# EAGLE board gemma (EAGLE 6.3)
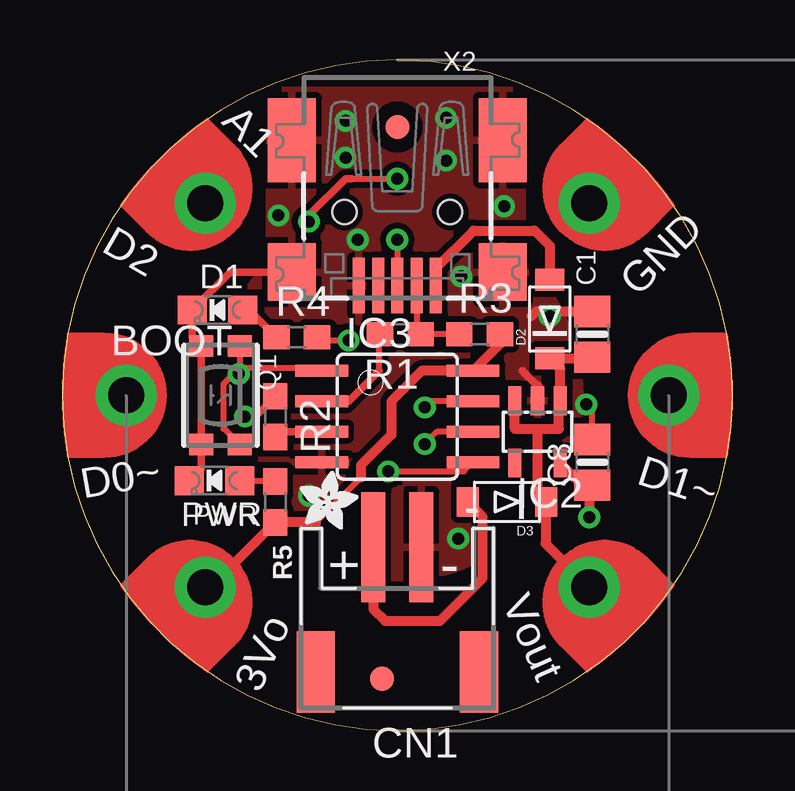
[diagram p0: board, top side]
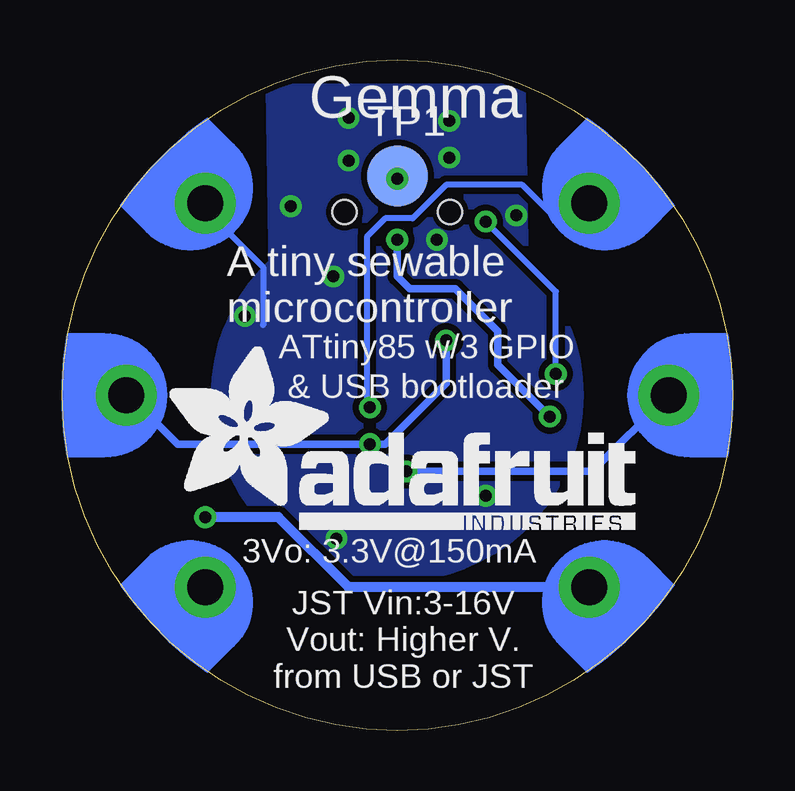
[diagram p1: board, bottom side, seen from below]

Size 27.94 x 27.94 mm. Coordinates in mm from the lower left corner, seen from the top.
Outline: 0,13.97 arc90 13.97,0 arc90 27.94,13.97 arc90 13.97,27.94 arc90 0,13.97
Copper layers (1*16): Top 0.035mm / dielectric 1.5mm / Bottom 0.035mm
Design rules "adafruit *": minimum track width 8mil, minimum drill 15.5mil, track to track 10mil, track to pad 10mil, pad to pad 12mil, via to via 10mil, smd to smd 8mil, copper to edge 10mil, drill to drill 8mil, minimum pad ring 10mil, minimum via ring 8mil, stop-mask expansion 4mil, vias tented up to drill 20mil, thermal gap 10mil

## Footprints (pad centres in the part's own frame; a part is rotated, then mirrored left to right if it is on the bottom)
SEWINGTAP_2.0 = drill 1.5 pad 2.54: P$1 0,0
CHIPLED_0805_NOOUTLINE = smd 1.2 x 1.2: A 0,-1.05; C 0,1.05
0805-NO = smd 1.3 x 1.5: 1 -0.95,0; 2 0.95,0
JST-PH-2-SMT-RA = smd 1 x 4.6: 1 1,-3.7; 2 -1,-3.7 | smd 1.6 x 3.4: NC1 -3.4,1.5; NC2 3.4,1.5
SOD-123FL = smd 0.91 x 1.22: A 1.637,0; C -1.637,0
SOT23-5L = smd 0.55 x 1.2: 1 -0.95,-1.3; 2 0,-1.3; 3 0.95,-1.3; 4 0.95,1.3; 5 -0.95,1.3
SOIC8 = smd 0.5 x 2.2: 1 -1.905,-3.154; 2 -0.645,-3.154; 3 0.625,-3.154; 4 1.895,-3.154; 5 1.905,3.154; 6 0.635,3.154; 7 -0.635,3.154; 8 -1.905,3.154
BTN_KMR2_4.6X2.8 = smd 0.9 x 1: A 2.05,0.8; A' -2.05,0.8; B 2.05,-0.8; B' -2.05,-0.8
0603-NO = smd 1.1 x 1: 1 -0.85,0; 2 0.85,0
B2,54 = smd 2.54 x 2.54: TP 0,0
FIDUCIAL_1MM = smd 1 x 1: 1 0,0
USB-MINI_MEDIUM = smd 0.5 x 2.308: D+ 0,4.064; D- -0.8,4.064; GND 1.6,4.064; ID 0.8,4.064; VBUS -1.6,4.064 | smd 2 x 3.5: GND1 -4.4,-2; GND4 4.4,-2 | smd 2 x 2.4: GND2 -4.4,3.5; GND3 4.4,3.5 | hole 1: -2.2,1; 2.2,1

## Placement (x,y rotation side)
3V3  SEWTAP-2.0IN  [SEWINGTAP_2.0]  5.97,5.97 135 top
B0  SEWTAP-2.0IN  [SEWINGTAP_2.0]  2.67,13.97 90 top
B1  SEWTAP-2.0IN  [SEWINGTAP_2.0]  25.27,13.97 270 top
B2  SEWTAP-2.0IN  [SEWINGTAP_2.0]  5.97,21.97 45 top
BOOT  red  [CHIPLED_0805_NOOUTLINE]  6.48,17.53 90 top
C1  10uF  [0805-NO]  22.1,16.51 90 top
C8  10uF  [0805-NO]  22.1,11.18 90 top
CN1  JST-PH  [JST-PH-2-SMT-RA]  13.97,3.94 180 top
D2  SCHOTTKY  [SOD-123FL]  20.32,17.14 90 top
D3  SCHOTTKY  [SOD-123FL]  18.54,9.53 180 top
GND  SEWTAP-2.0IN  [SEWINGTAP_2.0]  21.97,21.97 315 top
IC2  MIC5225-3.3v  [SOT23-5L]  19.81,12.45 180 top
IC3  ATTINY85  [SOIC8]  13.97,13.08 270 top
PWR  green  [CHIPLED_0805_NOOUTLINE]  6.35,10.41 90 top
Q1  reset  [BTN_KMR2_4.6X2.8]  6.6,13.97 270 top
R1  68 (0603)  [0603-NO]  14.1,16.51 180 top
R2  68 (0603)  [0603-NO]  8.89,13.08 270 top
R3  1.5K (0603)  [0603-NO]  17.4,16.51 0 top
R4  470 (0603)  [0603-NO]  9.78,16.38 0 top
R5  470 (0603)  [0603-NO]  8.89,9.53 270 top
TP1  TPB2,54  [B2,54]  13.97,23.11 0 bottom
U$1  FIDUCIAL  [FIDUCIAL_1MM]  13.97,25.15 0 top
U$2  [ADAFRUIT_2.5MM]  9.91,8.38 0 top
U$6  FIDUCIAL  [FIDUCIAL_1MM]  13.34,2.16 0 top
U$7  [ADAFRUIT_TEXT_20MM]  23.62,8.38 0 bottom
VBAT  SEWTAP-2.0IN  [SEWINGTAP_2.0]  21.97,5.97 225 top
X2  MiniB  [USB-MINI_MEDIUM]  13.97,22.61 180 top

## Library data of the parts
3V3 B0 B1 B2 CN1 D2 D3 GND IC2 U$1 U$6 VBAT = adafruit
BOOT C1 C8 PWR Q1 R1-R5 U$2 U$7 X2 = microbuilder
IC3 = avr
TP1 = testpad

## Nets
+3V3: 3V3.P$1 C8.1 IC2.5 IC3.8 R3.2 R5.2
B0: B0.P$1 IC3.5
B1: B1.P$1 IC3.6 R4.2
B2: B2.P$1 IC3.7
GND: BOOT.C C1.2 C8.2 CN1.2 GND.P$1 IC2.2 IC3.4 PWR.C Q1.B Q1.B' X2.GND X2.GND1 X2.GND2 X2.GND3 X2.GND4
N$1: IC3.1 Q1.A Q1.A' TP1.TP
N$2: R2.1 X2.D+
N$3: IC3.2 R1.2
N$4: IC3.3 R2.2
N$5: R1.1 R3.1 X2.D-
N$6: BOOT.A R4.1
N$7: C1.1 D2.C D3.C IC2.1 IC2.3 VBAT.P$1
N$8: PWR.A R5.1
VBAT: CN1.1 D3.A
VBUS: D2.A X2.VBUS

## Tracks (layer width: path | path; a pad name or v marks a point on that pad's centre or on a via)
+3V3  (via drill 0.5)
  Top 0.254: 3V3.P$1 6.18,5.97 | 12.45,10.54 10.58,8.68
  Top 0.406: IC2.5 21.68,10.23 C8.1 21.97,10.1 v21.97,8.89 | 17.51,14.99 IC3.8 | IC3.8 14.99,14.99 13.72,13.72 13.72,12.32 12.45,11.05 12.45,10.54 | 10.58,8.68 R5.2 6.18,5.97 | R3.2 18.25,16.11 IC3.8
  Bottom 0.406: 3V3.P$1 16,5.97 18.92,8.89 v21.97,8.89
B0  (via drill 0.5)
  Top 0.254: v13.59,10.8 16.74,10.8 IC3.5
  Bottom 0.305: B0.P$1 5.84,10.8 v13.59,10.8
B1  (via drill 0.5)
  Top 0.254: R4.2 10.76,16.26 v11.94,16.26 | IC3.6 15.62,12.45 v15.11,11.94
  Bottom 0.254: 25.27,13.59 B1.P$1
  Bottom 0.305: B1.P$1 25.15,13.97 23.11,11.94 v15.11,11.94 14.48,11.94 11.94,14.48 v11.94,16.26
B2  (via drill 0.5)
  Top 0.254: IC3.7 15.37,13.72 v15.11,13.46
  Bottom 0.254: B2.P$1 5.97,21.59 7.62,21.59 8.76,22.73 11.94,22.73 13.34,21.34 14.48,21.34 15.24,20.57 15.24,13.59 v15.11,13.46
GND  (via drill 0.5)
  Top 0.254: GND.P$1 22.1,21.84 | 10.18,9.67 v10.29,9.78 | C8.2 22.1,13.34 v21.84,13.59 | 19.81,14.22 IC2.2
  Top 0.305: PWR.C 5.8,10.92 Q1.B Q1.B' 5.43,16.4 BOOT.C 7.01,19.11 X2.GND3 | 19.81,14.35 19.18,14.99
  Top 0.406: C1.2 19.75,17.46 19.56,17.27 | IC2.2 19.81,14.35
  Bottom 0.254: 19.56,16.89 19.56,19.3 21.97,21.72 GND.P$1 | v21.84,13.59 21.21,13.59
  other vias: 12.32,20.45 16.51,8 11.81,25.4 16,25.53 16,23.75 18.41,21.84 11.81,23.88 16.64,18.92 9.02,21.46 20.32,17.27
  pour Bottom: 6.35,13.97 arc90 13.97,6.35 arc90 21.59,13.97 arc90 13.97,21.59 arc90
  pour Bottom: 8.76,26.8 8.64,18.92 19.18,18.92 19.3,26.8
  pour Top: 6.35,13.97 arc90 13.97,6.35 arc90 21.59,13.97 arc90 13.97,21.59 arc90
  pour Top: 8.64,26.67 8.64,18.92 19.18,18.92 19.18,26.67
N$1  (via drill 0.5)
  Top 0.254: Q1.A' 7.4,15.11 | 7.4,15.11 7.37,15.11 v7.37,14.86 | 7.4,15.11 6.73,14.44 6.73,12.57 6.75,12.57 Q1.A | 12.07,22.99 v13.97,22.99 | 7.4,15.11 10.69,15.11 IC3.1
  Top 0.305: 12.07,22.99 11.81,22.99 10.29,21.46 v10.29,21.21
  Bottom 0.254: v7.37,14.86 7.37,18.29 v10.29,21.21 | 14.48,22.61 14.35,22.61 v13.97,22.99 TP1.TP
N$2  (via drill 0.5)
  Top 0.254: v13.97,20.45 X2.D+
  Top 0.305: R2.1 8.04,13.08 v7.62,13.08
  Bottom 0.305: v7.62,13.08 9.78,15.24 9.78,16.64 11.56,18.41 13.46,18.41 13.97,18.92 v13.97,20.45
N$3
  Top 0.254: 11.95,13.73 IC3.2 | 13.21,14.99 13.21,16.47 R1.2
  Top 0.305: 11.95,13.73 13.21,14.99
N$4
  Top 0.305: IC3.3 9.12,12.46 R2.2
N$5
  Top 0.254: R3.1 R1.1 14.77,16.69 X2.D-
N$6
  Top 0.305: BOOT.A 7.79,17.53 R4.1
N$7
  Top 0.254: 21.94,15.4 C1.1
  Top 0.406: 19.81,12.57 18.86,12.57 IC2.3 | 19.81,12.57 20.7,12.57 20.7,13.75 IC2.1 20.76,15.07 D2.C 22.05,15.51 C1.1 | 19.81,12.57 19.81,9.85 19.85,9.85 D3.C 20.18,7.8 20.14,7.8 VBAT.P$1
N$8
  Top 0.254: PWR.A 8.85,10.41 R5.1
VBAT
  Top 0.406: CN1.1 12.97,5.06 13.46,4.57 15.75,4.57 17.53,6.35 17.53,8.9 D3.A
VBUS
  Top 0.406: X2.VBUS 15.57,19.25 17.14,20.83 19.69,20.83 20.32,20.19 D2.A

## Text on the board
tPlace: A1 | D2 | D1 | GND | D0~ | D1~ | PWR | + | - | Vout | 3Vo
bPlace: Gemma | A tiny sewable / microcontroller | ATtiny85 w/3 GPIO | & USB bootloader | 3Vo: 3.3V@150mA | JST Vin:3-16V / Vout: Higher V. / from USB or JST
tDocu: SCL/SCK | GND | SDA/MOSI | MISO | 3-16VDC